# Altium PCB DAL_IRL.PcbDoc
Units mm, origin at the board's own origin, x right, y up, seen from the top; angles counter-clockwise.
Board outline 30.51 x 30.51 mm, 2 copper layers (Top Layer, Bottom Layer); 14 components, 11 nets, 42 pads, 2 vias.
Unrouted connection lines stored in the file: 4.
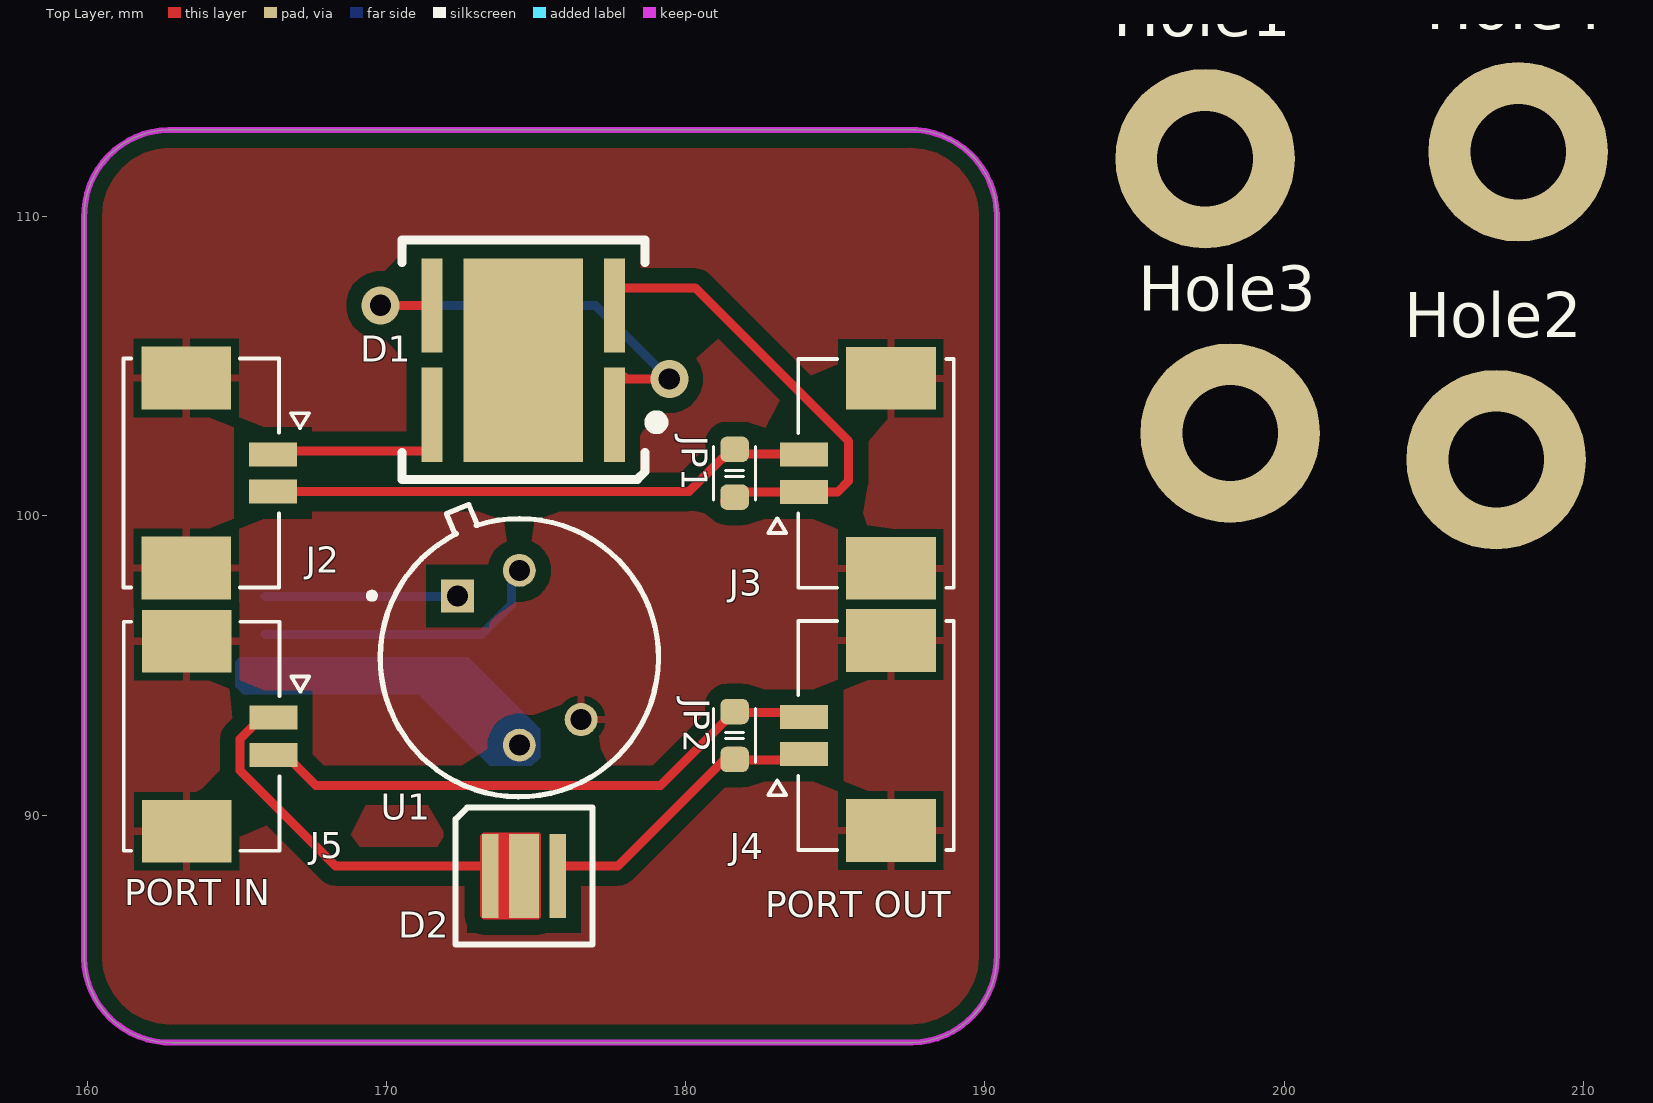
[diagram p0: Top Layer view]
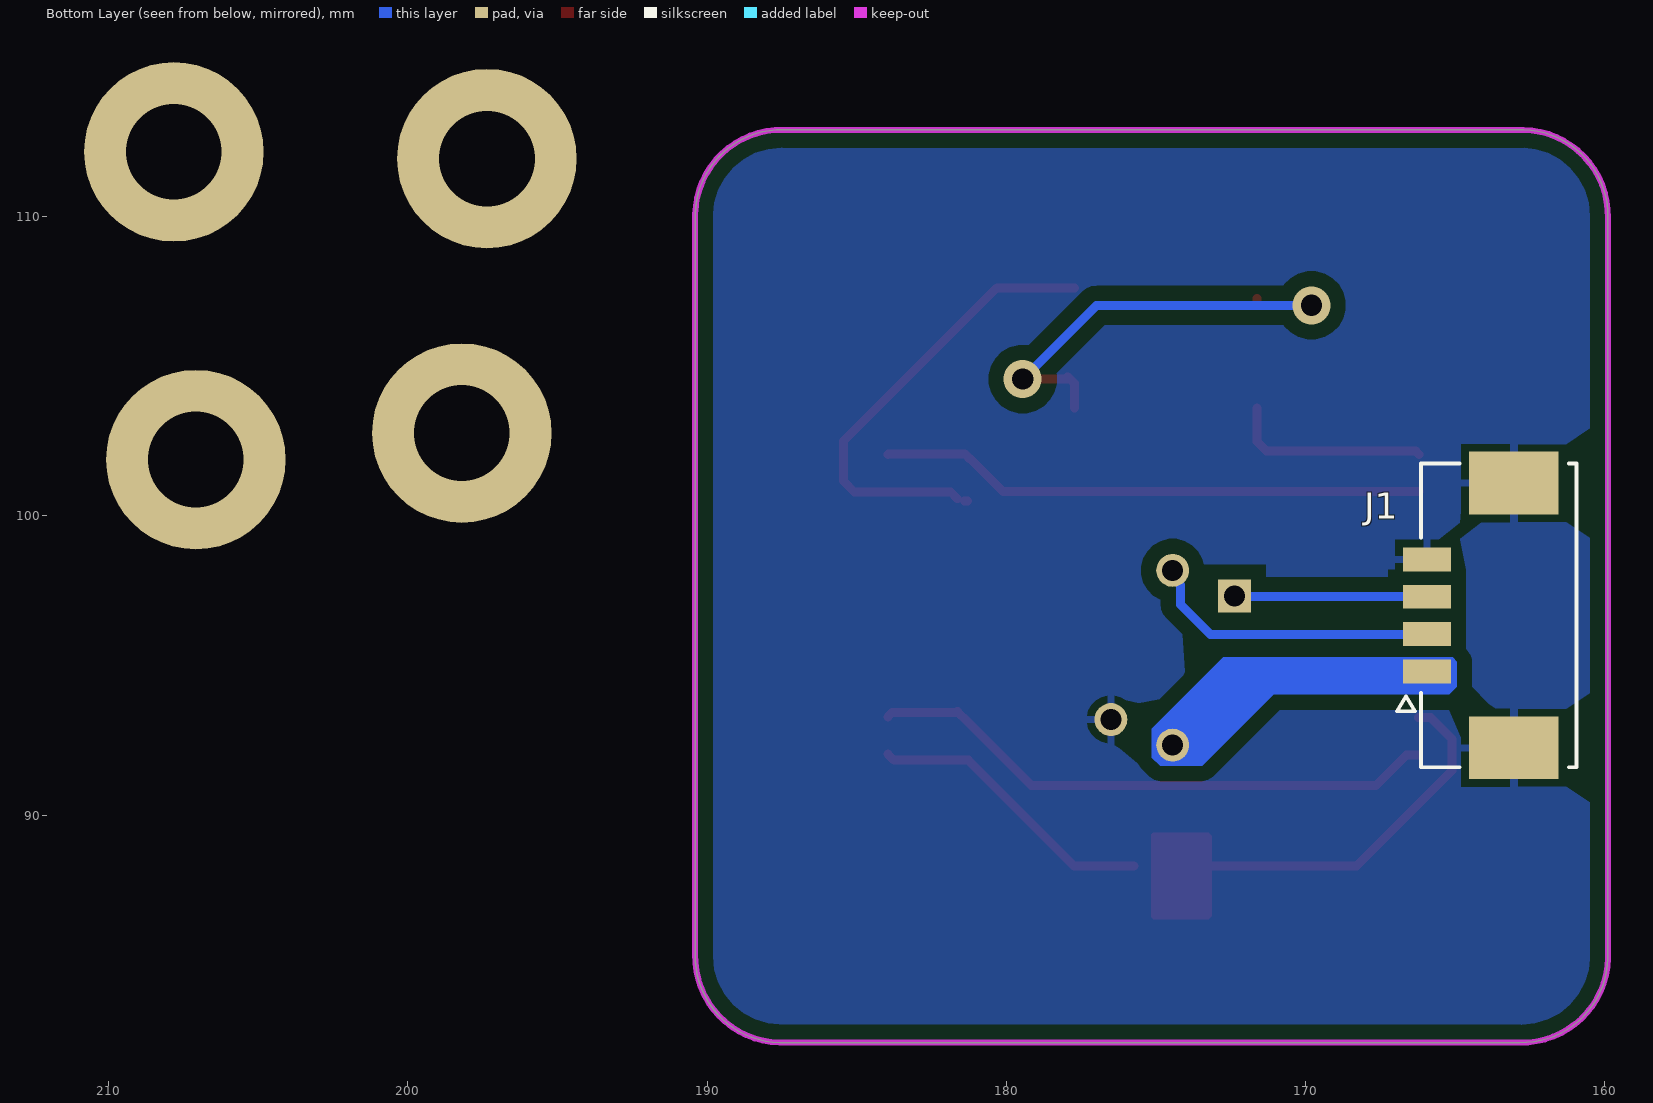
[diagram p1: Bottom Layer view, seen from below]

## Layer stack, top to bottom
Top Solder: solder mask 0.0102, Solder Resist, Dk 3.5
Top Layer: signal copper 0.0356
Dielectric 1: dielectric 0.32, FR-4, Dk 4.8
Bottom Layer: signal copper 0.0356
Bottom Solder: solder mask 0.0102, Solder Resist, Dk 3.5

## Board outline
159.893,85.217 159.893,109.957 cw(c162.776,110.02) 162.712,112.903 187.452,112.903 cw(c187.515,110.02) 190.398,110.084 190.398,85.344 cw(c187.516,85.281) 187.579,82.398 162.84,82.398 cw(c162.776,85.281)

## Design rules (kind name [scope] priority, off if disabled: settings)
Clearance Clearance_SHIELD [InNet('GND')] p1: gap=0.5 ignorepadtopadclearanceinfootprint=TRUE
Clearance [All] p2: gap=0.125 ignorepadtopadclearanceinfootprint=TRUE except(0.15: Arc-Fill Arc-Poly Track-Poly Track-Text SMDPad-Poly THPad-Fill Via-Fill Via-Poly Fill-Fill Fill-Poly Poly-Poly; 0.2: THPad-Poly; 0.52: Track-Fill)
PolygonConnect [All] p1: connectstyle=Relief reliefconductorwidth=0.254 reliefentries=4 polygonreliefangle="90 Angle" airgapwidth=0.254
RoutingVias [All] p1: holewidth=0.711 width=1.27 viastyle="Through Hole" minholewidth=0.711 minwidth=1.27 maxholewidth=0.711 maxwidth=1.27
SolderMaskExpansion [All] p1: expansion=0.102 istentingtop=FALSE
SupplyNets "Schematic Supply Nets_1" [InNet('GND')] p1: voltage=0.000
SupplyNets "Schematic Supply Nets" [InNet('+3V3')] p2: voltage=0.000
UnRoutedNet [All] p1: checkbadconnections=TRUE
Width Width_SHILED [InNet('GND')] p1: maxlimit=3 minlimit=1 preferedwidth=2 minimp=50.000000 maximp=50.000000 favimp=50.000000
Width [All] p2: maxlimit=1 minlimit=0.254 preferedwidth=0.3 minimp=50.000000 maximp=50.000000 favimp=50.000000
29 further rules are at their usual default settings.

## Components (designator, comment, footprint, x,y, rotation, side; value= is the part's Value field where it differs from the comment)
D1 "XHP70D" "XHP70.3 High Intensity" 177.624,103.382 r180 top
D2 "SFH 4715AS" "SFH 4715AS" 174.6,87.96 r270 top
Hole1 "hole_space" HEX-M3_NoVia 197.358,111.938 r0 top
Hole2 "hole_space" HEX-M3_NoVia 207.086,101.879 r0 top
Hole3 "hole_space" HEX-M3_NoVia 198.196,102.768 r0 top
Hole4 "hole_space" HEX-M3_NoVia 207.823,112.166 r0 top
J1 "HEADER 4x1" MOLEX_0532610471 163.543,96.672 r90 bottom
J2 "Header 2x1_2M" MOLEX_0532610271 163.81,101.432 r270 top
J3 "Header 2x1_2M" MOLEX_0532610271 186.36,101.422 r90 top
J4 "Header 2x1_2M" MOLEX_0532610271 186.36,92.659 r90 top
J5 "Header 2x1_2M" MOLEX_0532610271 163.822,92.634 r270 top
JP1 "DNP/0R" RES_C_1608X60 181.635,101.422 r270 top
JP2 "DNP/0R" RES_C_1608X60 181.635,92.659 r270 top
U1 "MLX90642" "TO39 package" 172.375,97.322 r0 top

## Footprints (in the part's own frame and the unit in brackets; to place one, negate y for a bottom-side part, rotate by r counter-clockwise, add the part's x,y. Pads: shape width x height; smd on the part's side, far side on the other; paste and mask are expansions set on the pad)
HEX-M3_NoVia [mm]
  round 6 / inner round 4.4 / far side round 6 hole 3.2: 1(0,0)
MOLEX_0532610271 [mm]
  rect 0.8x1.6 smd mask+0.076: 1(-0.625,2.4) 2(0.625,2.4)
  rect 2.1x3 smd mask+0.076: M1(-3.175,-0.5) M2(3.175,-0.5)
  silkscreen extent -3.83,-2.6 3.83,3.6, body extent -3.83,-2.6 3.83,2.6, height 3.4
MOLEX_0532610471 [mm]
  rect 0.8x1.6 smd mask+0.076: 1(-1.875,2.4) 2(-0.625,2.4) 3(0.625,2.4) 4(1.875,2.4)
  rect 2.1x3 smd mask+0.076: M1(-4.425,-0.5) M2(4.425,-0.5)
  silkscreen extent -5.07,-2.6 5.07,3.4, body extent -5.07,-2.6 5.07,2.6, height 3.4
RES_C_1608X60 [mm] "Chip Resistor, 2-Leads, Body 1.63x0.83mm, IPC High Density"
  rrect50% 0.85x0.95 smd: 1(-0.8,0) 2(0.8,0)
  silkscreen extent -0.9,-0.7 0.9,0.7, body extent -0.87,-0.48 0.87,0.48, height 0.6
"SFH 4715AS" [mm]
  rect 2.8x0.55 smd paste-2 mask+0: A1(0,-1.125) C(0,1.125)
  rect 2.8x1 smd paste-2 mask+0: A2(0,0)
  silkscreen extent -2.29,-2.29 2.29,2.29, body extent -1.91,-1.92 1.94,1.92, height 2.41
"TO39 package" [mm]
  rect 1.1x1.1 / inner round 1.1 / far side rect 1.1x1.1 hole 0.7: 1(0,0)
  round 1.1 hole 0.7: 2(2.065,-4.985) 3(4.13,-4.13) 4(2.065,0.855)
  silkscreen extent -2.96,-6.71 6.71,3.06, body extent -2.57,-6.7 6.7,3.01, height 6.1
"XHP70.3 High Intensity" [mm]
  rect 0.7x3.15 smd paste-1000 mask+0: 1(0,0) 2(6.1,0) 3(0,-3.65) 4(6.1,-3.65)
  rect 4x6.8 smd paste-1000 mask+0: 5(3.05,-1.825)
  silkscreen extent -1.6,-5.84 7.11,2.16, body extent -0.62,-5.49 6.71,1.84, height 0.25

## Part data
D1: "LED Lighting XLamp® XHP70.3 White, Cool 5000K 11.2V 1.05A 120° 2828"
D2: "Infrared (IR) Emitter 860nm 3.2V 1.5A"
J1: library part "Header 4x1_2M"
JP1 JP2: library part JUMPER_1_1
U1: "32X24 THERMAL ARRAY, 110DEG FOV"

## Via types
v1: diameter 1.27, hole 0.711, Top Layer to Bottom Layer, 2 vias

## Nets (pads, with @x,y where several pads share a name; then routed paths per layer and width w, separated by ;. In a path a pad name is that pad's centre, name@x,y a point inside that pad or via, vN(x,y) a via of type N, cw(c..) or ccw(c..) an arc to the next point about the centre after c; other vN are vias at no path point)
+3V3: J1.1 U1.2 | length 0
  Bottom Layer w0.3: J1.1 J1.1@165.984,94.797
GND: Hole1.1 Hole2.1 Hole3.1 Hole4.1 J1.4 J1.M1 J1.M2 J2.M1 J2.M2 J3.M1 J3.M2 J4.M1 J4.M2 J5.M1 J5.M2 U1.3
IR_1_N_OUT: J2.2 J3.2 JP1.1 | length 18.3
  Top Layer w0.3: J2.2 180.106,100.807 181.223,101.924 181.241,101.924 181.387,102.07 183.937,102.07 J3.2
IR_1_P_IN: D1.2 J2.1 | length 6.7
  Top Layer w0.3: J2.1 166.315,102.162 171.301,102.162 171.626,102.487 D1.2@171.626,103.61
IR_1_P_OUT: D1.3 J3.1 JP1.2 | length 15.3
  Top Layer w0.3: D1.3@177.726,107.616 180.318,107.616 185.443,102.491 185.443,101.166 185.074,100.797 J3.1 181.861,100.797 JP1.2@181.635,100.571 ; JP1.2@181.305,100.495 JP1.2@181.401,100.495
IR_2_N_OUT: J4.2 J5.2 JP2.1 | length 19.2
  Top Layer w0.3: J5.2 166.622,92.009 167.64,90.991 179.167,90.991 181.287,93.111 181.287,93.115 181.632,93.459 JP2.1 ; JP2.1@181.635,93.434 183.81,93.434 J4.2
IR_2_P_IN: D2.A1 D2.A2 J5.1 | length 13.3
  Top Layer w0.3: J5.1 165.822,93.259 165.1,92.537 165.1,91.491 168.3,88.29 173.482,88.29 D2.A2@174.607,88.29
IR_2_P_OUT: D2.C J4.1 JP2.2 | length 9.8
  Top Layer w0.3: D2.C@175.732,88.29 177.726,88.29 181.269,91.834 183.759,91.834 J4.1
NetD1_1: D1.1 D1.4 | length 15.4
  Top Layer w0.3: v1(169.801,107.038) 171.626,107.038 D1.4@171.626,107.26 ; D1.1@177.726,103.61 177.726,104.425 177.949,104.648 177.949,104.572 v1(179.451,104.572)
  Bottom Layer w0.3: v1(169.801,107.038) 176.985,107.038 v1(179.451,104.572)
SCL: J1.2 U1.4 | length 9.9
  Bottom Layer w0.3: J1.2 165.943,96.042 173.182,96.042 174.182,97.042 174.182,97.691 174.44,97.948 U1.4
SDA: J1.3 U1.1 | length 6.4
  Bottom Layer w0.3: J1.3 172.35,97.297 U1.1
pads on no net: D1.5

## Polygon pours and split planes (outlines as drawn)
GND on Top Layer "GND_L01_P000" (solid, pour order 0): 159.893,85.217 159.893,109.957 cw(c162.776,110.02) 162.712,112.903 187.452,112.903 cw(c187.515,110.02) 190.398,110.084 190.398,85.344 cw(c187.516,85.281) 187.579,82.398 162.84,82.398 cw(c162.776,85.281)
GND on Bottom Layer "GND_L02_P001" (solid, pour order 1): 159.893,85.217 159.893,109.957 cw(c162.776,110.02) 162.712,112.903 187.452,112.903 cw(c187.515,110.02) 190.398,110.084 190.398,85.344 cw(c187.516,85.281) 187.579,82.398 162.84,82.398 cw(c162.776,85.281)

## Keep-outs
Keep-Out Layer:
  lines w0.2: 159.893,85.217 ccw(c162.776,85.281) 162.84,82.398 187.579,82.398 ; 159.893,85.217 159.893,85.217 ; 159.893,85.217 159.893,109.957 cw(c162.776,110.02) 162.712,112.903 ; 162.712,112.903 162.712,112.903 ; 162.712,112.903 187.452,112.903 cw(c187.515,110.02) 190.398,110.084 ; 187.579,82.398 ccw(c187.515,85.281) 190.398,85.344 190.398,110.084 ; 187.579,82.398 187.579,82.398 ; 190.398,110.084 190.398,110.084

## Other copper
Top Layer:
  region net IR_2_P_IN: 175.082,86.512 173.228,86.512 173.126,86.614 173.126,89.306 173.228,89.408 175.108,89.408 175.158,89.357 175.158,86.589 175.133,86.563
Bottom Layer:
  region net +3V3: 165.075,95.275 172.745,95.275 175.133,92.888 175.133,91.923 174.854,91.643 173.457,91.643 171.069,94.031 165.202,94.031 164.948,94.285 164.948,95.123

## Silkscreen, mask and mechanical layers (free items; w line width, h text height)
Top Overlay:
  text "PORT IN" at 161.239,86.683 h1.5
  text "PORT OUT" at 182.651,86.276 h1.5